# Altium PCB Audiodevice.PcbDoc (part 2 of 3)
Units mm, origin at the board's own origin, x right, y up, seen from the top; angles counter-clockwise.
Board outline 193.67 x 66.67 mm, 2 copper layers (Top Layer, Bottom Layer); 196 components, 164 nets, 795 pads, 323 vias.
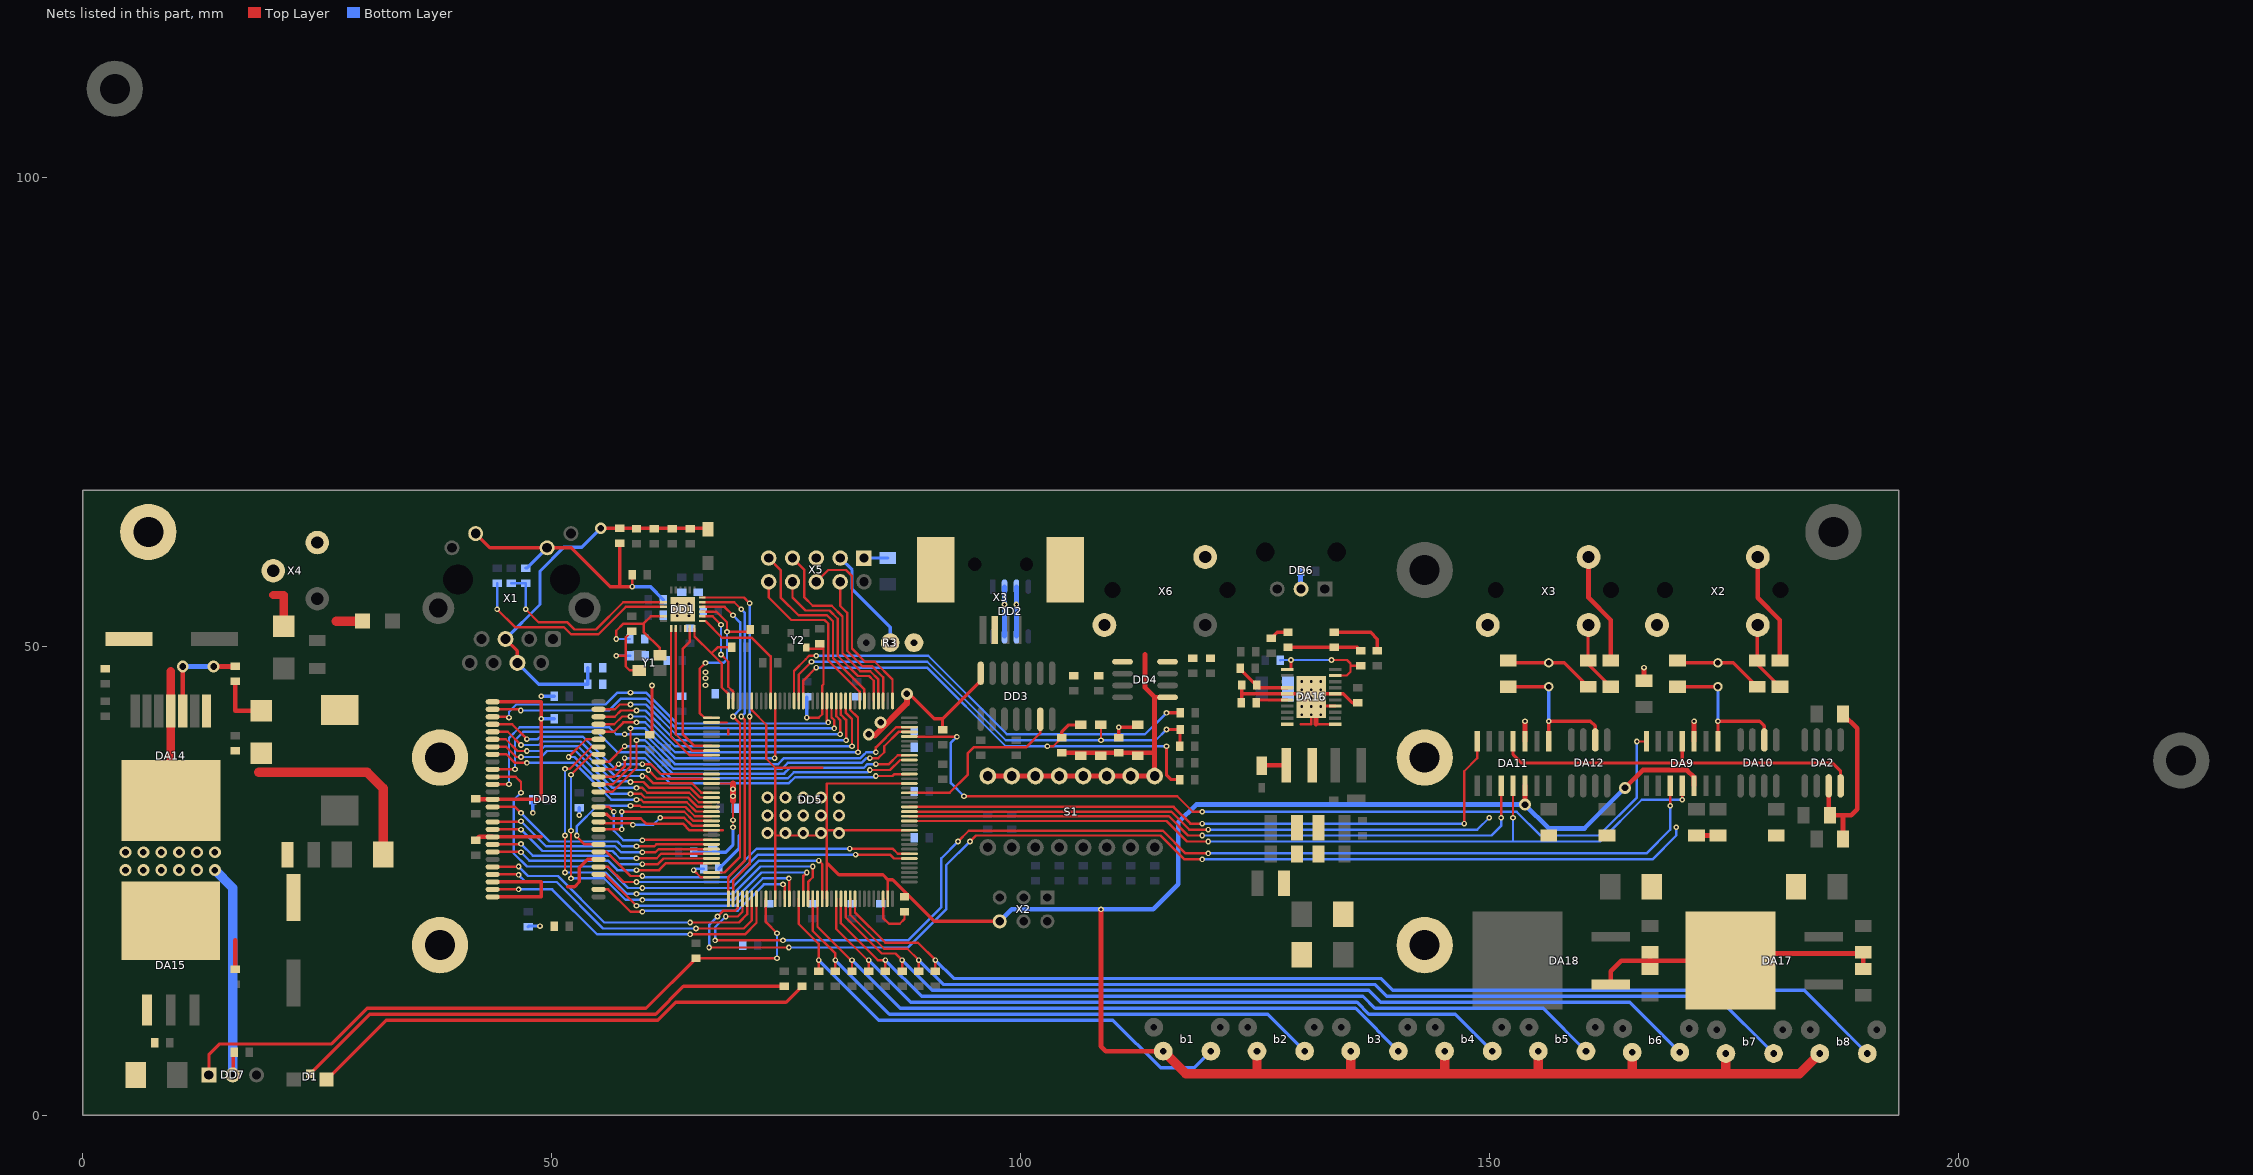
[diagram p2: the nets of this part, all layers, seen from the top]

## Via types
v1: diameter 0.6, hole 0.3, Top Layer to Bottom Layer, 276 vias
v2: diameter 1.27, hole 0.711, Top Layer to Bottom Layer, 47 vias

## Nets (pads, with @x,y where several pads share a name; then routed paths per layer and width w, separated by ;. In a path a pad name is that pad's centre, name@x,y a point inside that pad or via, vN(x,y) a via of type N, cw(c..) or ccw(c..) an arc to the next point about the centre after c; other vN are vias at no path point) (continued)
ADC1: D4.1 DD5.20 R59.1 R61.2 | length 54.6
  Top Layer w0.254: DD5.20@76.856,44.201 76.856,46.376 v1(78.232,47.752) ; v1@102.743,39.37 v1(102.87,39.37) 103.505,39.37 R61.2@104.394,40.259
  Top Layer w0.35: R61.2@104.394,40.259 104.394,40.894 105.14,41.64 D4.1@106.426,41.64 ; v1(115.57,39.37) 115.57,36.322 116.078,35.814 R59.1@116.993,35.814
  Bottom Layer w0.254: v1(78.232,47.752) 90.05,47.752 98.432,39.37 v1(102.87,39.37) v1(115.57,39.37)
ADC2: D3.1 DD5.21 R57.1 R60.2 | length 51.4
  Top Layer w0.254: DD5.21@76.356,44.201 76.356,47.019 v1(77.724,48.387) ; v1(108.585,40.005) D3.1@108.585,41.64
  Top Layer w0.35: v1(115.57,41.148) R60.2@117.018,41.148 117.018,39.37 R57.1@116.993,39.37
  Bottom Layer w0.254: v1(77.724,48.387) 90.057,48.387 98.439,40.005 v1(108.585,40.005) 114.427,40.005 v1(115.57,41.148)
ADC3: D2.1 DD5.22 R58.1 R62.2 | length 53.5
  Top Layer w0.254: DD5.22@75.856,44.201 75.856,47.403 77.097,48.644 77.097,48.647 77.464,49.014 77.467,49.014 77.475,49.022 v1(78.232,49.022)
  Top Layer w0.35: R62.2@110.49,40.259 v1(110.49,41.402) 112.284,41.402 D2.1@112.522,41.64 ; v1(115.57,42.926) R58.1@117.018,42.926
  Bottom Layer w0.254: v1(78.232,49.022) 90.17,49.022 98.552,40.64 110.49,40.64 ; v1(110.49,41.402) 110.49,40.64 ; v1(115.57,42.926) 113.284,40.64 110.49,40.64
Bt_1: b1.2 DD5.88 R33.1 | length 55.9
  Top Layer w0.254: DD5.88@76.356,23.101 76.356,20.418 78.486,18.288 v1(78.486,16.561) R33.1@78.486,15.392
  Bottom Layer w0.35: v1(78.486,16.561) 84.887,10.16 109.855,10.16 114.935,5.08 118.527,5.08 b1.2@120.305,6.858
Bt_2: b2.2 DD5.91 R34.1 | length 62.8
  Top Layer w0.254: DD5.91@77.856,23.101 77.856,19.68 80.264,17.272 v1(80.264,16.561) R34.1@80.264,15.392
  Bottom Layer w0.35: v1(80.264,16.561) 86.03,10.795 126.368,10.795 b2.2@130.305,6.858
Bt_3: b3.2 DD5.92 R35.1 | length 71.6
  Top Layer w0.254: DD5.92@78.356,23.101 78.356,20.12 v1@82.042,16.434 ; R35.1@82.042,15.392 v1@82.042,16.434 ; v1(82.042,16.561) v1@82.042,16.434
  Bottom Layer w0.35: v1(82.042,16.561) 87.173,11.43 135.733,11.43 b3.2@140.305,6.858
Bt_4: b4.2 DD5.96 R36.1 | length 79.8
  Top Layer w0.254: DD5.96@80.356,23.101 80.356,19.898 v1@83.82,16.434 ; R36.1@83.82,15.392 v1@83.82,16.434 ; v1(83.82,16.561) v1@83.82,16.434
  Bottom Layer w0.35: v1(83.82,16.561) 88.316,12.065 135.89,12.065 137.16,10.795 146.368,10.795 b4.2@150.305,6.858
Bt_5: b5.2 DD5.97 R37.1 | length 88.9
  Top Layer w0.254: DD5.97@80.856,23.101 80.856,20.49 84.785,16.561 v1(85.598,16.561) R37.1@85.598,15.392
  Bottom Layer w0.35: v1(85.598,16.561) 89.459,12.7 136.525,12.7 137.795,11.43 155.733,11.43 b5.2@160.305,6.858
Bt_6: b6.2 DD5.98 R38.1 | length 98.1
  Top Layer w0.254: DD5.98@81.356,23.101 81.356,21.133 85.217,17.272 86.665,17.272 v1(87.376,16.561) R38.1@87.376,15.392
  Bottom Layer w0.35: v1(87.376,16.561) 90.602,13.335 137.16,13.335 138.43,12.065 164.971,12.065 b6.2@170.305,6.731
Bt_7: b7.2 DD5.99 R39.1 | length 107.5
  Top Layer w0.254: DD5.99@81.856,23.101 81.856,21.395 85.471,17.78 87.935,17.78 v1(89.154,16.561) R39.1@89.154,15.392
  Bottom Layer w0.35: v1(89.154,16.561) 91.745,13.97 137.795,13.97 139.065,12.7 174.209,12.7 b7.2@180.305,6.604
Bt_8: b8.2 DD5.100 R40.1 | length 116.8
  Top Layer w0.254: DD5.100@82.356,23.101 82.356,21.657 85.598,18.415 89.078,18.415 v1(90.932,16.561) R40.1@90.932,15.392
  Bottom Layer w0.35: v1(90.932,16.561) 92.888,14.605 138.43,14.605 139.7,13.335 183.574,13.335 b8.2@190.305,6.604
Coax_nEN: DD3.13 DD5.128 | length 19.4
  Top Layer w0.254: DD5.128@88.156,34.401 92.445,34.401 94.361,36.317 94.361,38.608 94.996,39.243 100.584,39.243 102.108,40.767 DD3.13@102.108,42.254
CS1: DA11.7 DD5.125 | length 69.3
  Top Layer w0.254: DD5.125@88.156,32.901 116.332,32.901 118.118,31.115 v1(119.38,31.115) ; v1(147.32,31.115) 147.32,36.703 148.717,38.1 DA11.7@148.717,39.903
  Bottom Layer w0.254: v1(119.38,31.115) v1(147.32,31.115)
CS2: DA9.7 DD5.140 | length 94.4
  Top Layer w0.254: DD5.140@88.156,40.401 93.203,40.401 v1(93.218,40.386) ; v1(93.98,34.036) 116.713,34.036 118.364,32.385 v1(119.38,32.385) ; v1(165.735,39.878) 166.726,39.878 DA9.7@166.751,39.903
  Bottom Layer w0.254: v1(93.218,40.386) 92.583,39.751 92.583,35.433 v1(93.98,34.036) ; v1(119.38,32.385) 152.908,32.385 155.448,29.845 161.671,29.845 165.735,33.909 v1(165.735,39.878)
En: DA16.9 DA16.11 R48.1 R51.2 | length 12.8
  Top Layer w0.254: v1(133.167,48.57) 134.818,48.57 135.199,48.189 135.199,47.955 ; DA16.9@133.558,46.908 134.792,46.908 135.199,47.315 135.199,47.955 ; R51.2@136.271,47.955 135.199,47.955
  Top Layer w0.35: DA16.11@128.458,47.558 128.849,47.558 v1(128.849,48.57)
  Bottom Layer w0.254: R48.1@127.706,48.519 127.757,48.57 v1(128.849,48.57) v1(133.167,48.57)
Eth_CRS_DV: DD1.11 DD5.43 | length 15.1
  Top Layer w0.254: DD1.11@64.746,51.918 64.746,50.522 64.008,49.784 64.008,40.633 65.236,39.405 DD5.43@67.047,39.405
Eth_MDC: DD1.13 DD5.27 | length 13.6
  Top Layer w0.254: DD1.13@66.053,52.725 66.401,52.725 68.199,50.927 71.374,50.927 73.356,48.945 DD5.27@73.356,44.201
Eth_MDIO: DD1.12 DD5.36 R1.1 | length 11.6
  Top Layer w0.254: DD1.12@65.246,51.918 65.246,51.086 67.056,49.276 ; DD5.36@68.856,44.201 68.856,44.936 68.145,45.647 68.145,48.187 67.056,49.276 ; R1.1@69.215,49.911 67.691,49.911 67.056,49.276
Eth_REF_CLK: DD1.14 DD5.35 | length 11
  Top Layer w0.254: DD1.14@66.053,53.225 67.171,53.225 v1(68.072,52.324) ; v1(68.072,49.149) 68.834,48.387 68.834,45.72 69.356,45.198 DD5.35@69.356,44.201
  Bottom Layer w0.254: v1(68.072,49.149) v1(68.072,52.324)
Eth_RST: DD1.15 DD5.37 R2.1 | length 19.2
  Top Layer w0.254: DD1.15@66.053,53.725 67.564,53.725 68.707,52.582 v1(68.707,51.562) 70.917,51.562 R2.1@71.171,51.816 ; v1(66.421,48.26) 65.786,47.625 65.786,42.926 66.311,42.401 DD5.37@67.056,42.401
  Bottom Layer w0.254: v1(66.421,48.26) 68.326,48.26 68.707,48.641 v1(68.707,51.562)
Eth_RX_ER: DD1.10
Eth_RXD0: DD1.8 DD5.44 | length 15.8
  Top Layer w0.254: DD1.8@63.246,51.918 63.246,40.64 64.981,38.905 DD5.44@67.047,38.905
Eth_RXD1: DD1.7 DD5.45 | length 16.6
  Top Layer w0.254: DD1.7@62.738,51.898 62.738,40.386 64.719,38.405 DD5.45@67.047,38.405
Eth_TX_EN: DD1.16 DD5.70 | length 34.1
  Top Layer w0.254: DD1.16@66.053,54.225 68.457,54.225 v1(69.342,53.34) ; DD5.70@67.056,25.901 68.446,25.901 70.096,27.551 70.096,41.791 v1(69.342,42.545)
  Bottom Layer w0.254: v1(69.342,42.545) 70.104,43.307 70.104,52.578 v1(69.342,53.34)
Eth_TXD0: DD1.17 DD5.73 | length 36.6
  Top Layer w0.254: DD1.17@66.053,54.725 69.481,54.725 v1(70.231,53.975) ; DD5.73@68.856,23.101 68.856,25.422 70.612,27.178 70.612,42.164 v1(70.231,42.545)
  Bottom Layer w0.254: v1(70.231,42.545) 70.612,42.926 70.612,53.594 v1(70.231,53.975)
Eth_TXD1: DD1.18 DD5.74 | length 37.4
  Top Layer w0.254: DD1.18@66.053,55.225 70.505,55.225 v1(71.12,54.61) ; DD5.74@69.356,23.101 69.356,25.033 71.12,26.797 v1@71.12,42.418
  Bottom Layer w0.254: v1(71.12,42.545) v1(71.12,54.61)
Eye: DD5.81 DD7.1 R20.1 | length 73.8
  Top Layer w0.254: R20.1@65.405,16.764 v1(74.041,16.764) v1@74.041,16.891 ; DD5.81@72.856,23.101 72.856,20.616 v1(74.041,19.431)
  Top Layer w0.35: DD7.1@13.462,4.318 13.462,6.477 14.605,7.62 26.543,7.62 30.353,11.43 60.071,11.43 R20.1@65.405,16.764
  Bottom Layer w0.254: v1@74.041,16.891 v1(74.041,19.431)
FMC_A0: DD5.10 DD8.23 | length 35.2
  Top Layer w0.254: DD8.23@55.016,40.906 56.654,40.906 57.658,41.91 v1(59.055,41.91) ; DD5.10@81.856,44.201 81.856,43.239 82.677,42.418 v1(82.677,38.735)
  Bottom Layer w0.254: v1(59.055,41.91) 59.986,41.91 63.161,38.735 v1(82.677,38.735)
FMC_A1: DD5.11 DD8.24 | length 33.8
  Top Layer w0.254: DD8.24@55.016,41.706 56.692,41.706 57.531,42.545 v1(58.42,42.545) ; DD5.11@81.356,44.201 81.356,42.977 82.042,42.291 v1(82.042,39.37)
  Bottom Layer w0.254: v1(58.42,42.545) 59.993,42.545 63.168,39.37 v1(82.042,39.37)
FMC_A2: DD5.12 DD8.25 | length 32.4
  Top Layer w0.254: DD8.25@55.016,42.506 56.73,42.506 57.404,43.18 v1(59.055,43.18) ; DD5.12@80.856,44.201 80.856,42.727 81.407,42.176 v1(81.407,40.005)
  Bottom Layer w0.254: v1(59.055,43.18) 60,43.18 63.175,40.005 v1(81.407,40.005)
FMC_A3: DD5.13 DD8.26 | length 31
  Top Layer w0.254: DD8.26@55.016,43.306 56.768,43.306 57.277,43.815 v1(58.42,43.815) ; DD5.13@80.356,44.201 80.356,42.585 80.772,42.169 v1(80.772,40.64)
  Bottom Layer w0.254: v1(58.42,43.815) 60.071,43.815 63.246,40.64 v1(80.772,40.64)
FMC_A4: DD5.14 DD8.29 | length 41.3
  Top Layer w0.254: DD8.29@43.716,43.306 v1@46.711,43.306 ; DD5.14@79.856,44.201 79.856,42.443 80.137,42.162 v1(80.137,41.275)
  Bottom Layer w0.254: v1(46.711,43.18) 56.134,43.18 57.404,44.45 60.078,44.45 63.253,41.275 v1(80.137,41.275)
FMC_A5: DD5.15 DD8.30 | length 41.1
  Top Layer w0.254: DD8.30@43.716,42.506 45.378,42.506 v1(45.466,42.418) ; DD5.15@79.356,44.201 79.356,42.056 v1(79.502,41.91)
  Bottom Layer w0.254: v1(45.466,42.418) 45.466,43.053 46.228,43.815 55.753,43.815 57.023,45.085 v1(58.42,45.085) 60.085,45.085 63.379,41.791 79.383,41.791 v1(79.502,41.91)
FMC_A6: DD5.50 DD8.31 | length 25.9
  Top Layer w0.254: DD8.31@43.716,41.706 45.797,41.706 v1(47.371,40.132) ; v1(60.325,36.83) 61.25,35.905 DD5.50@67.047,35.905
  Bottom Layer w0.254: v1(47.371,40.132) 48.514,40.132 48.768,40.386 53.34,40.386 56.896,36.83 v1(60.325,36.83)
FMC_A7: DD5.53 DD8.32 | length 26.3
  Top Layer w0.254: DD8.32@43.716,40.906 45.327,40.906 v1(46.736,39.497) ; v1(59.69,36.195) 60.071,36.195 60.833,35.433 64.946,35.433 65.978,34.401 DD5.53@67.056,34.401
  Bottom Layer w0.254: v1(46.736,39.497) 48.641,39.497 49.022,39.878 53.086,39.878 56.769,36.195 v1(59.69,36.195)
FMC_A8: DD5.54 DD8.33 | length 26.3
  Top Layer w0.254: DD8.33@43.716,40.106 45.111,40.106 46.355,38.862 v1(47.371,38.862) ; v1(58.42,35.56) 59.817,35.56 60.452,34.925 64.812,34.925 65.832,33.905 DD5.54@67.047,33.905
  Bottom Layer w0.254: v1(47.371,38.862) 48.768,38.862 49.276,39.37 52.832,39.37 56.569,35.633 58.347,35.633 v1(58.42,35.56)
FMC_A9: DD5.55 DD8.34 | length 26.3
  Top Layer w0.254: DD8.34@43.716,39.306 45.149,39.306 46.228,38.227 v1(46.736,38.227) ; v1(59.055,34.925) 59.69,34.925 60.198,34.417 64.678,34.417 65.69,33.405 DD5.55@67.047,33.405
  Bottom Layer w0.254: v1(46.736,38.227) 48.895,38.227 49.53,38.862 52.578,38.862 56.515,34.925 v1(59.055,34.925)
FMC_A10: DD5.56 DD8.22 | length 21.8
  Top Layer w0.254: v1(51.816,38.227) 53.695,40.106 DD8.22@55.016,40.106 DD8.22@55.397,40.106 ; v1(58.42,34.29) 59.563,34.29 59.944,33.909 64.544,33.909 65.548,32.905 DD5.56@67.047,32.905
  Bottom Layer w0.254: v1(51.816,38.227) 52.451,38.227 56.388,34.29 v1(58.42,34.29)
FMC_A11: DD5.57 DD8.35 | length 25.9
  Top Layer w0.254: DD8.35@43.716,38.506 45.187,38.506 46.101,37.592 v1(47.371,37.592) ; v1(59.055,33.655) 59.556,33.655 59.817,33.394 64.417,33.394 65.406,32.405 DD5.57@67.047,32.405
  Bottom Layer w0.254: v1(47.371,37.592) 52.444,37.592 56.381,33.655 v1(59.055,33.655)
FMC_BA0: DD5.89 DD8.20 | length 45
  Top Layer w0.254: v1(52.07,25.273) v1@52.07,30.226 ; v1(52.07,36.322) 54.254,38.506 DD8.20@55.016,38.506 ; DD5.89@76.856,23.101 76.856,25.548 v1(77.216,25.908)
  Bottom Layer w0.254: v1(52.07,25.273) 55.626,25.273 57.912,22.987 v1(59.69,22.987) 69.469,22.987 72.39,25.908 v1(77.216,25.908) ; v1(52.07,30.353) v1(52.07,36.322)
FMC_BA1: DD5.90 DD8.21 | length 47.7
  Top Layer w0.254: v1(51.435,25.908) v1@51.435,29.718 ; v1(51.435,36.957) 51.943,36.957 54.292,39.306 DD8.21@55.016,39.306 ; DD5.90@77.356,23.101 77.356,24.905 77.851,25.4 v1(77.851,26.543)
  Bottom Layer w0.254: v1(51.435,25.908) 55.753,25.908 58.039,23.622 v1(59.055,23.622) 69.342,23.622 72.263,26.543 v1(77.851,26.543) ; v1(51.435,29.845) v1(51.435,36.957)
FMC_D0: DD5.85 DD8.2 | length 23.5
  Top Layer w0.254: DD8.2@55.016,24.106 56.031,24.106 58.42,21.717 v1(59.69,21.717) ; v1(74.676,24.638) 74.856,24.458 DD5.85@74.856,23.101
  Bottom Layer w0.254: v1(59.69,21.717) 59.817,21.844 69.85,21.844 72.644,24.638 v1(74.676,24.638)
FMC_D1: DD5.86 DD8.4 | length 25.1
  Top Layer w0.254: DD8.4@55.016,25.706 55.701,25.706 v1(59.055,22.352) ; v1(75.311,25.273) 75.356,25.228 DD5.86@75.356,23.101
  Bottom Layer w0.254: v1(59.055,22.352) 69.596,22.352 72.517,25.273 v1(75.311,25.273)
FMC_D2: DD5.114 DD8.5 | length 35.2
  Top Layer w0.254: DD8.5@55.016,26.506 56.044,26.506 57.658,24.892 v1(59.055,24.892) ; v1(82.423,27.813) 86.106,27.813 86.518,27.401 DD5.114@88.156,27.401
  Bottom Layer w0.254: v1@59.055,24.765 v1@59.063,24.773 ; v1(59.055,24.892) 69.088,24.892 72.009,27.813 v1(82.423,27.813)
FMC_D3: DD5.115 DD8.7 | length 35.7
  Top Layer w0.254: DD8.7@55.016,28.106 55.841,28.106 58.42,25.527 v1(59.69,25.527) ; v1(81.788,28.448) 86.36,28.448 86.907,27.901 DD5.115@88.156,27.901
  Bottom Layer w0.254: v1(59.69,25.527) 59.817,25.4 68.834,25.4 71.882,28.448 v1(81.788,28.448)
FMC_D4: DD5.58 DD8.8 | length 19.9
  Top Layer w0.254: v1@52.705,29.718 53.517,28.906 DD8.8@55.016,28.906 DD8.8@55.397,28.906 ; v1(58.42,33.02) 59.436,33.02 59.563,32.893 64.276,32.893 65.264,31.905 DD5.58@67.047,31.905
  Bottom Layer w0.254: v1@52.705,29.718 v1(52.705,29.845) 52.705,30.861 54.864,33.02 v1(58.42,33.02)
FMC_D5: DD5.59 DD8.10 | length 14.3
  Top Layer w0.254: DD8.10@55.016,30.506 v1(57.48,30.506) ; v1(57.48,32.385) 64.142,32.385 65.122,31.405 DD5.59@67.047,31.405
  Bottom Layer w0.254: v1(57.48,30.506) v1(57.48,32.385)
FMC_D6: DD5.60 DD8.11 | length 12.8
  Top Layer w0.254: DD8.11@55.016,31.306 55.182,31.14 58.522,31.14 v1(58.674,30.988) ; v1(61.595,31.75) 64.135,31.75 64.98,30.905 DD5.60@67.047,30.905
  Bottom Layer w0.254: v1(58.674,30.988) 60.833,30.988 v1(61.595,31.75)
FMC_D7: DD5.63 DD8.13 | length 14.8
  Top Layer w0.254: DD8.13@55.016,32.906 56.121,32.906 v1(56.642,32.385) ; v1@59.69,29.21 59.881,29.401 DD5.63@67.056,29.401
  Bottom Layer w0.254: v1(56.642,32.385) 56.642,30.353 57.658,29.337 59.563,29.337 v1@59.69,29.21
  other v1: 59.69,29.337
FMC_D8: DD5.64 DD8.42 | length 25.2
  Top Layer w0.254: DD8.42@43.716,32.906 46.088,32.906 v1(46.736,32.258) ; v1(59.055,28.702) 60.96,28.702 61.159,28.901 DD5.64@67.056,28.901
  Bottom Layer w0.254: v1(46.736,32.258) 49.784,29.21 57.023,29.21 57.531,28.702 v1(59.055,28.702)
FMC_D9: DD5.65 DD8.44 | length 24.9
  Top Layer w0.254: DD8.44@43.716,31.306 46.673,31.306 v1(46.736,31.369) ; v1(59.69,28.067) 61.087,28.067 61.421,28.401 DD5.65@67.056,28.401
  Bottom Layer w0.254: v1(46.736,31.369) 49.403,28.702 56.769,28.702 57.404,28.067 v1(59.69,28.067)
FMC_D10: DD5.66 DD8.45 | length 24.8
  Top Layer w0.254: DD8.45@43.716,30.506 46.71,30.506 v1(46.736,30.48) ; v1(59.055,27.432) 61.214,27.432 61.683,27.901 DD5.66@67.056,27.901
  Bottom Layer w0.254: v1(46.736,30.48) 49.022,28.194 56.515,28.194 57.277,27.432 v1(59.055,27.432)
FMC_D11: DD5.67 DD8.47 | length 24.5
  Top Layer w0.254: DD8.47@43.716,28.906 46.686,28.906 v1(46.736,28.956) ; v1(59.69,26.797) 61.341,26.797 61.945,27.401 DD5.67@67.056,27.401
  Bottom Layer w0.254: v1(46.736,28.956) 48.006,27.686 56.261,27.686 57.15,26.797 v1(59.69,26.797)
FMC_D12: DD5.68 DD8.48 | length 24.5
  Top Layer w0.254: DD8.48@43.716,28.106 46.697,28.106 v1(46.736,28.067) ; v1(59.055,26.162) 61.468,26.162 62.207,26.901 DD5.68@67.056,26.901
  Bottom Layer w0.254: v1(46.736,28.067) 47.625,27.178 56.007,27.178 57.023,26.162 v1(59.055,26.162)
FMC_D13: DD5.77 DD8.50 | length 31.6
  Top Layer w0.254: DD8.50@43.716,26.506 v1@46.482,26.506 ; v1(64.77,20.574) 69.977,20.574 70.856,21.453 DD5.77@70.856,23.101
  Bottom Layer w0.254: v1(46.482,26.543) 47.498,25.527 50.673,25.527 55.626,20.574 v1(64.77,20.574)
FMC_D14: DD5.78 DD8.51 | length 32.7
  Top Layer w0.254: DD8.51@43.716,25.706 v1@46.482,25.706 ; v1(65.405,19.939) 70.485,19.939 71.356,20.81 DD5.78@71.356,23.101
  Bottom Layer w0.254: v1(46.482,25.654) 47.244,24.892 50.546,24.892 55.499,19.939 v1(65.405,19.939)
FMC_D15: DD5.79 DD8.53 | length 32.9
  Top Layer w0.254: DD8.53@43.716,24.106 v1(46.482,24.106) ; v1(64.77,19.304) 70.612,19.304 71.856,20.548 DD5.79@71.856,23.101
  Bottom Layer w0.254: v1@46.736,24.106 50.062,24.106 54.864,19.304 v1(64.77,19.304)
FMC_NBL0: DD5.141 DD8.15 | length 40.4
  Top Layer w0.254: DD8.15@55.016,34.506 56.477,34.506 59.055,37.084 v1(59.055,40.005) ; v1(83.947,38.1) 84.836,38.1 85.471,38.735 85.471,39.37 87.002,40.901 DD5.141@88.156,40.901
  Bottom Layer w0.254: v1(59.055,40.005) 59.965,40.005 63.013,36.957 74.549,36.957 75.184,37.592 83.063,37.592 83.571,38.1 v1(83.947,38.1)
FMC_NBL1: DD5.142 DD8.39 | length 53.4
  Top Layer w0.254: DD8.39@43.716,35.306 v1(45.466,35.306) ; v1(84.582,38.735) 84.582,39.243 86.74,41.401 DD5.142@88.156,41.401
  Bottom Layer w0.254: v1(45.466,35.306) 45.466,40.259 46.609,41.402 56.134,41.402 56.896,40.64 v1(57.785,40.64) 59.972,40.64 63.147,37.465 74.168,37.465 74.803,38.1 82.929,38.1 83.304,38.475 83.304,38.48 83.559,38.735 v1(84.582,38.735)
FMC_nCAS: DD5.132 DD8.17 | length 36
  Top Layer w0.254: DD8.17@55.016,36.106 56.678,36.106 57.785,37.213 v1(57.785,38.1) ; v1(84.582,36.195) 86.36,36.195 86.566,36.401 DD5.132@88.156,36.401
  Bottom Layer w0.254: v1(57.785,38.1) 59.944,38.1 62.611,35.433 75.318,35.433 75.953,36.068 84.455,36.068 v1(84.582,36.195)
FMC_nRAS: DD5.49 DD8.18 | length 12.7
  Top Layer w0.254: DD8.18@55.016,36.906 56.591,36.906 v1(57.15,37.465) ; v1(59.69,37.465) 60.579,37.465 61.639,36.405 DD5.49@67.047,36.405
  Bottom Layer w0.254: v1(57.15,37.465) v1(59.69,37.465)
FMC_nWE: DD5.26 DD8.16 | length 31.1
  Top Layer w0.254: DD8.16@55.016,35.306 56.52,35.306 58.42,37.206 v1(58.42,41.275) ; v1(73.787,38.1) 73.856,38.169 DD5.26@73.856,44.201
  Bottom Layer w0.254: v1(58.42,41.275) 59.979,41.275 63.154,38.1 v1(73.787,38.1)
FMC_SDCKE1: DD5.135 DD8.37 | length 50.8
  Top Layer w0.254: DD8.37@43.716,36.906 v1(46.101,36.906) ; v1(83.947,36.83) 86.106,36.83 87.177,37.901 DD5.135@88.156,37.901
  Bottom Layer w0.254: v1(46.101,36.906) 46.101,40.005 46.99,40.894 54.864,40.894 57.023,38.735 59.951,38.735 62.745,35.941 75.184,35.941 75.819,36.576 83.693,36.576 v1(83.947,36.83)
FMC_SDCLK: DD5.93 DD8.38 | length 50.7
  Top Layer w0.254: DD8.38@43.716,36.106 46.19,36.106 46.736,35.56 v1(46.736,34.417) ; v1(78.486,27.178) 78.856,26.808 DD5.93@78.856,23.101
  Bottom Layer w0.254: v1(46.736,34.417) 45.974,33.655 45.974,27.94 47.371,26.543 55.88,26.543 58.166,24.257 v1(59.69,24.257) 69.215,24.257 72.136,27.178 v1(78.486,27.178)
FMC_SDnE1: DD5.136 DD8.19 | length 35.8
  Top Layer w0.254: DD8.19@55.016,37.706 56.121,37.706 v1(57.785,39.37) ; v1(84.582,37.465) 85.979,37.465 86.915,38.401 DD5.136@88.156,38.401
  Bottom Layer w0.254: v1(57.785,39.37) 59.958,39.37 62.879,36.449 74.803,36.449 75.438,37.084 83.312,37.084 83.693,37.465 v1(84.582,37.465)
GND: b1.1 b2.1 b3.1 b4.1 b5.1 b6.1 b7.1 b8.1 C1.1 C2.1 C3.1 C4.1 C5.1 C6.2 C7.1 C8.1 C9.1 C10.1 C11.1 C12.1 C13.2 C14.2 C15.1 C16.2 C17.2 C18.2 C21.2 C22.2 C23.2 C24.2 C25.2 C26.2 C27.2 C28.2 C29.2 C30.2 C31.2 C32.2 C33.2 C34.2 C35.2 C36.2 C37.2 C38.2 C39.2 C40.2 C41.2 C42.2 C43.2 C44.2 C45.2 C46.2 C47.2 C52.2 C53.2 C54.2 C55.2 C60.2 C61.2 C62.2 C64.2 C65.2 C66.2 C67.2 C70.1 C71.1 C72.1 C74.1 C75.1 C76.1 C77.1 C78.2 C79.2 C80.1 C81.1 C82.1 C83.1 C84.2 C85.1 C86.1 C87.2 C88.2 C90.2 C91.2 D2.2 D3.2 D4.2 D6.2 D7.1 D8.2 D9.1 D12.2 D13.2 D14.1 D15.1 DA2.3 DA9.3 DA9.12 DA11.3 DA11.12 DA14.4 DA14.8 DA15.1 DA15.4 DA16.1 DA16.4 DA16.6 DA16.15 DA16.21 DA17.4 DA18.1 DD1.25 DD2.2 DD2.3 DD2.6 DD2.7 DD3.7 DD4.1 DD4.4 DD4.5 DD5.16 DD5.31 DD5.38 DD5.51 DD5.61 DD5.83 DD5.94 DD5.107 DD5.120 DD5.130 DD6.2 DD7.2 DD8.6 DD8.12 DD8.28 DD8.41 DD8.46 DD8.52 DD8.54 L2.1 pad.Mount@7,62.215 pad.Mount@38.1,18.16 pad.Mount@38.1,38.16 pad.Mount@143.1,18.16 pad.Mount@143.1,38.16 R3.1 R4.2 R9.1 R15.1 R18.1 R22.1 R31.2 R47.1 R51.1 R53.1 R61.1 R62.1 S1.9 S1.10 S1.11 S1.12 S1.13 S1.14 S1.15 S1.16 X1.10 X1.11 X2.2@178.629,59.547 X2.3@167.879,52.297 X2.6 X3.2@160.579,59.547 X3.3@149.829,52.297 X3.4 X3.5 X3.6 X4.2 X4.3 X5.1 X5.5 X6.2 X6.3 Y2.2 | length 685.6
  Top Layer w0.254: v1(58.598,56.388) R9.1@58.598,57.658 R9.1@58.598,57.785 ; 59.512,31.674 60.071,31.115 64.008,31.115 64.722,30.401 ; DD5.51@67.056,35.401 69.342,35.401 ; DD5.38@67.056,41.901 68.707,41.901 ; 68.834,40.64 68.834,41.148 ; v1@69.342,31.225 v1(69.342,31.496) 69.342,33.528 ; DD5.31@71.356,44.201 71.356,43.198 72.898,41.656 72.898,38.042 73.856,37.084 ; DD5.83@73.856,23.101 73.856,29.845 ; Y2.2@77.152,49.771 78.995,49.771 ; v1(77.216,42.418) 78.486,42.418 78.856,42.788 DD5.16@78.856,44.201 78.856,45.836 78.995,45.975 78.995,49.771 ; C23.2@78.613,50.292 78.995,49.91 78.995,49.771 ; 78.856,37.084 73.856,37.084 ; DD5.94@79.356,23.101 79.356,26.797 ; 79.502,26.797 79.356,26.797 ; DD5.107@85.856,23.101 85.856,25.142 ; DD5.120@88.156,30.401 79.356,30.401 ; DD5.130@88.156,35.401 79.356,35.401 79.356,30.401 ; 73.856,29.845 79.356,29.845 ; 73.856,29.845 73.856,37.084 ; 79.356,26.797 79.356,29.845 ; 79.356,29.845 79.356,30.401
  Top Layer w0.3: 64.722,30.401 DD5.61@67.056,30.401 68.264,30.401 ; 129.916,41.708 131.008,41.708 v1(131.008,42.728) v1(131.008,43.617) v1(131.008,44.506) DA16.21@131.008,44.633 ; 131.519,41.708 DA16.1@133.558,41.708
  Top Layer w0.35: DD7.2@16.002,4.318 16.053,4.369 C16.2@16.053,6.731 ; C31.2@41.91,33.782 C31.2@41.986,33.706 ; X1.11@41.91,62.05 43.43,60.53 X1.10@49.53,60.53 52.119,60.53 56.261,56.388 57.277,56.388 ; DD8.54@43.716,23.306 48.895,23.306 48.895,24.906 DD8.52@43.716,24.906 ; DD8.46@43.716,29.706 48.895,29.706 ; DD8.41@43.716,33.706 48.895,33.706 v1(48.895,42.291) 48.895,44.106 DD8.28@43.716,44.106 ; 51.689,24.384 52.451,24.384 52.959,24.892 52.959,26.416 53.849,27.306 DD8.6@55.016,27.306 ; DD8.12@55.016,32.106 55.905,32.106 56.337,31.674 59.512,31.674 ; C13.2@57.277,61.011 57.277,56.388 ; v1(58.598,56.388) 57.277,56.388 ; R22.1@60.452,40.589 60.706,40.843 v1(60.706,45.847) ; 79.502,26.797 80.645,25.654 85.344,25.654 85.856,25.142 86.364,25.142 90.805,20.701 X2.6@97.79,20.701 ; v2(87.884,44.958) 88.138,44.958 90.805,42.291 91.694,42.291 ; R31.2@91.694,41.148 91.694,42.291 ; DD3.7@95.758,47.154 95.758,46.355 91.694,42.291 ; C83.1@123.566,43.998 123.596,43.998 123.596,44.958 ; C84.2@123.596,45.903 123.596,44.958 ; C86.1@128.524,49.911 C85.1@133.477,49.911 135.915,49.911 R51.1@136.271,49.555 ; DA16.21@131.519,43.744 131.605,43.658 DA16.4@133.558,43.658 ; DA16.21@131.643,44.958 DA16.6@133.558,44.958 134.442,44.958 135.402,43.998 R53.1@135.961,43.998 ; DA16.21@131.897,45.522 DA16.21@131.008,44.633 130.683,44.958 DA16.15@128.458,44.958 123.596,44.958
  Top Layer w0.5: C70.1@16.256,15.57 16.256,18.669 ; C30.2@41.91,29.337 42.279,29.706 DD8.46@43.716,29.706 ; C31.2@41.986,33.706 DD8.41@43.716,33.706 ; S1.16@96.52,36.195 S1.15@99.06,36.195 S1.14@101.6,36.195 S1.13@104.14,36.195 S1.12@106.68,36.195 S1.11@109.22,36.195 S1.10@111.76,36.195 S1.9@114.3,36.195 114.3,38.659 ; R61.1@104.394,38.659 R62.1@110.49,38.659 114.3,38.659 ; v1(108.585,21.971) 108.585,7.366 109.093,6.858 b1.1@115.225,6.858 ; 113.284,49.149 113.284,45.593 114.3,44.577 ; DD4.1@115.684,44.577 114.3,44.577 ; 131.519,41.708 DA16.21@131.519,43.744 ; v2@153.797,33.02 v2(153.797,33.147) DA11.12@153.797,35.179 ; DA11.3@153.797,39.903 v1(153.797,42.037) ; X3.2@160.579,59.547 160.579,55.194 162.941,52.832 C60.2@162.941,48.517 ; DA18.1@162.941,13.97 162.941,15.367 164.084,16.51 167.132,16.51 ; v2(164.465,34.925) 166.37,36.83 171.069,36.83 171.831,36.068 DA9.12@171.831,35.179 ; C61.2@166.497,46.358 v1(166.497,47.752) ; C90.2@167.132,15.624 167.132,16.51 ; C91.2@167.132,17.396 167.132,16.51 ; DA9.3@171.831,39.903 v1(171.831,42.037) ; C67.2@172.085,29.842 C66.2@174.371,29.842 ; X2.2@178.613,59.547 178.613,55.194 180.975,52.832 C52.2@180.975,48.517 ; C53.2@186.182,31.877 DA2.3@186.182,35.142 ; C53.2@186.312,32.004 187.709,32.004 ; C55.2@187.706,42.799 189.23,41.275 189.23,32.639 188.595,32.004 187.709,32.004 ; C54.2@187.709,29.464 187.709,32.004 ; C87.2@189.865,15.624 C88.2@189.865,17.272 ; C88.2@189.865,17.396 C88.2@189.865,17.272 ; 114.3,38.659 114.3,44.577 ; 167.132,16.51 DA17.4@175.724,16.51 176.486,17.272 C88.2@189.865,17.272
  Top Layer w0.6: 69.342,33.528 v1(69.342,34.036) v1(69.342,34.798) 69.342,35.401
  Top Layer w0.65: 84.455,40.513 87.884,43.942 v2(87.884,44.958)
  Top Layer w0.9: DA14.8@9.398,33.584 DA14.4@9.398,43.134 9.398,47.371 ; 20.319,55.499 21.463,55.499 D9.1@21.463,52.161
  Top Layer w1: 18.796,36.576 30.353,36.576 32.055,34.874 D8.2@32.055,27.813 D8.2@32.055,27.686 ; 27.051,52.705 C10.1@29.845,52.705 ; b1.1@115.225,6.858 117.638,4.445 125.225,4.445 ; b2.1@125.225,6.858 125.225,4.445 ; b3.1@135.225,6.858 135.225,4.445 ; b4.1@145.225,6.858 145.225,4.445 ; b5.1@155.225,6.858 155.225,4.445 ; b6.1@165.225,6.731 165.225,4.445 ; b7.1@175.225,6.604 175.225,4.445 ; b8.1@185.225,6.604 183.066,4.445 175.225,4.445 ; 125.225,4.445 135.225,4.445 ; 135.225,4.445 145.225,4.445 ; 145.225,4.445 155.225,4.445 ; 155.225,4.445 165.225,4.445 ; 165.225,4.445 175.225,4.445
  Bottom Layer w0.35: R4.2@47.244,58.369 47.369,58.369 X1.10@49.53,60.53 ; C32.2@47.498,20.117 47.574,20.193 v1(48.768,20.193) ; v1(48.006,32.258) C27.2@48.006,33.655 ; v1(48.895,42.291) C33.2@50.292,42.291 ; v1(48.895,44.704) C29.2@50.292,44.704 ; v1(52.959,32.004) C28.2@52.959,32.817 ; C35.2@65.151,28.067 68.58,28.067 69.342,28.829 v1(69.342,30.717) v1@69.342,30.844 ; C25.2@67.818,26.289 69.977,28.448 69.977,29.845 ; v1(77.216,42.418) C46.2@77.216,44.628 ; X5.1@83.312,59.436 C9.1@85.849,59.436
  Bottom Layer w0.4: v1(58.598,56.388) 60.516,56.388 C1.1@61.913,54.991
  Bottom Layer w0.5: X2.6@97.79,20.701 99.06,21.971 v1(108.585,21.971) 114.173,21.971 116.84,24.638 116.84,31.242 118.745,33.147 v2(153.797,33.147) 156.337,30.607 160.147,30.607 v2(164.465,34.925) ; DD2.7@98.298,51.088 DD2.2@98.298,56.388 ; DD2.6@99.568,51.088 v1(99.568,54.483) DD2.3@99.568,56.388 ; C22.2@129.87,58.039 129.87,55.949 DD6.2@129.921,55.898
  Bottom Layer w1: v2(14.097,26.162) 16.002,24.257 DD7.2@16.002,4.318
  other v1: 129.992,42.728 132.024,42.728 129.992,43.617 132.024,43.617 129.992,44.506 132.024,44.506 129.992,45.395 131.008,45.395 132.024,45.395 66.421,45.864 129.992,46.284 131.008,46.284 132.024,46.284 66.421,46.609 66.421,47.261 63.393,53.289 64.663,53.289 98.298,54.483 63.393,54.559 64.663,54.559
  other v2: 4.572,26.162 6.477,26.162 8.382,26.162 10.287,26.162 12.192,26.162 4.572,28.067 6.477,28.067 8.382,28.067 10.287,28.067 12.192,28.067 14.097,28.067 73.025,30.099 74.93,30.099 76.835,30.099 78.74,30.099 80.645,30.099 73.025,32.004 74.93,32.004 76.835,32.004 78.74,32.004 80.645,32.004 73.025,33.909 74.93,33.909 76.835,33.909 78.74,33.909 80.645,33.909 83.82,40.64 85.09,41.91
GNDS: DA2.4 DA9.4 DA11.4 | length 41
  Top Layer w0.35: DA11.4@152.527,39.903 152.527,38.481 153.416,37.592 170.561,37.592 ; DA9.4@170.561,39.903 170.561,37.592 ; DA2.4@187.452,35.142 187.452,36.703 186.563,37.592 170.561,37.592
L1.LINK: DD1.3 R12.1 | length 22.8
  Top Layer w0.254: v1(44.196,53.975) 46.101,52.07 51.308,52.07 52.07,51.308 54.991,51.308 57.908,54.225 DD1.3@61.939,54.225
  Bottom Layer w0.254: v1(44.196,53.975) R12.1@44.196,56.769
L2.SPEED: DD1.2 R4.1 R11.1 | length 21.1
  Top Layer w0.254: v1(47.244,53.975) 48.641,52.578 51.689,52.578 52.451,51.816 54.737,51.816 57.646,54.725 DD1.2@61.939,54.725
  Bottom Layer w0.254: R11.1@45.72,56.769 R4.1@47.244,56.769 v1(47.244,53.975)
LCD_D4: DD5.4 X5.7 | length 20.8
  Top Layer w0.254: X5.7@75.692,59.436 76.962,58.166 76.962,55.245 77.851,54.356 79.883,54.356 81.026,53.213 81.026,49.276 82.931,47.371 83.988,47.371 84.856,46.503 DD5.4@84.856,44.201
LCD_D5: DD5.5 X5.8 | length 18.5
  Top Layer w0.254: X5.8@75.692,56.896 75.692,55.245 77.089,53.848 79.629,53.848 80.518,52.959 80.518,49.022 82.677,46.863 83.854,46.863 84.356,46.361 DD5.5@84.356,44.201
LCD_D6: DD5.7 X5.9 | length 21.2
  Top Layer w0.254: X5.9@73.152,59.436 74.422,58.166 74.422,55.245 76.327,53.34 79.375,53.34 80.01,52.705 80.01,48.768 83.356,45.422 DD5.7@83.356,44.201
LCD_D7: DD5.8 X5.10 | length 18.8
  Top Layer w0.254: X5.10@73.152,56.896 73.152,55.245 75.565,52.832 79.121,52.832 79.502,52.451 79.502,48.514 82.856,45.16 DD5.8@82.856,44.201
LCD_E: DD5.1 X5.6 | length 20.3
  Top Layer w0.254: X5.6@78.232,56.896 79.502,58.166 81.407,58.166 82.042,57.531 82.042,49.784 83.439,48.387 84.455,48.387 86.356,46.486 DD5.1@86.356,44.201
LCD_RS: DD5.3 X5.4 | length 15.2
  Top Layer w0.254: X5.4@80.772,56.896 80.772,54.356 81.534,53.594 81.534,49.53 83.185,47.879 84.201,47.879 85.356,46.724 DD5.3@85.356,44.201
LCD_V0: R3.2 X5.3 | length 11.4
  Top Layer w0.254: X5.3@80.772,58.801 X5.3@80.899,58.801
  Bottom Layer w0.35: X5.3@80.772,59.436 82.042,58.166 82.042,56.134 86.106,52.07 R3.2@86.106,50.419
LDAC: DA9.11 DA11.11 DD5.122 | length 92.6
  Top Layer w0.254: DD5.122@88.156,31.401 115.57,31.401 117.761,29.21 v1(120.015,29.21) ; v1(152.527,31.75) DA11.11@152.527,35.179 ; v1(170.561,33.655) DA9.11@170.561,35.179
  Bottom Layer w0.254: v1(120.015,29.21) 152.527,29.21 ; v1(152.527,31.75) 152.527,29.21 ; v1(170.561,33.655) 166.243,33.655 161.798,29.21 152.527,29.21
MISO1: DD5.124 | length 63.2
  Top Layer w0.254: DD5.124@88.156,32.401 116.078,32.401 117.999,30.48 v1(120.015,30.48)
  Bottom Layer w0.254: v1(120.015,30.48) 148.717,30.48 v1(149.987,31.75)
MISO2: DD5.75 | length 121
  Top Layer w0.254: v1(66.802,17.907) v1(75.311,17.907) ; v1(67.691,21.209) 68.326,21.844 69.596,21.844 69.856,22.104 DD5.75@69.856,23.101 ; v1(94.615,29.21) 95.25,29.845 114.935,29.845 117.475,27.305 v1(119.38,27.305)
  Bottom Layer w0.254: v1(66.802,17.907) 66.802,20.32 v1(67.691,21.209) ; v1(75.311,17.907) 88.011,17.907 92.075,21.971 92.075,26.67 v1(94.615,29.21) ; v1(119.38,27.305) 167.386,27.305 169.926,29.845 v1(169.926,30.734)
MOSI1: DA11.10 DD5.123 | length 68.7
  Top Layer w0.254: DD5.123@88.156,31.901 115.824,31.901 117.88,29.845 v1(119.38,29.845) ; v1(151.257,31.75) DA11.10@151.257,35.179
  Bottom Layer w0.254: v1(119.38,29.845) 150.241,29.845 151.257,30.861 v1(151.257,31.75)
MOSI2: DA9.10 DD5.76 | length 122.8
  Top Layer w0.254: v1(67.437,18.669) v1(74.676,18.669) ; v1(68.58,21.209) 69.85,21.209 70.356,21.715 DD5.76@70.356,23.101 ; v1(93.345,29.21) 94.488,30.353 115.189,30.353 117.602,27.94 v1(120.015,27.94) ; v1(169.291,33.02) DA9.10@169.291,35.179
  Bottom Layer w0.254: v1@67.437,18.796 67.437,20.066 v1(68.58,21.209) ; v1(74.676,18.669) 88.011,18.669 91.567,22.225 91.567,27.432 v1(93.345,29.21) ; v1(120.015,27.94) 166.751,27.94 169.291,30.48 v1(169.291,33.02)
NetC11_2: C11.2 C12.2 C13.1 R5.2 R6.2 R7.2 R8.2 X1.4 X1.5 ZL1.2 | length 41.9
  Top Layer w0.35: X1.5@45.085,50.8 46.355,49.53 X1.4@46.355,48.26 ; v2(55.245,62.611) C13.1@57.277,62.611 66.57,62.611 ZL1.2@66.675,62.506
  Bottom Layer w0.35: X1.5@45.085,50.8 48.768,54.483 48.768,58.039 51.308,60.579 53.213,60.579 v2(55.245,62.611) ; X1.4@46.355,48.26 48.641,45.974 C12.2@53.848,45.974 C11.2@53.848,47.752
NetC14_1: C14.1 DD1.5 Y1.1 | length 12.1
  Top Layer w0.254: v1(56.896,50.8) 56.896,51.689 57.654,52.447 59.817,52.447 ; Y1.1@61.552,49.06 61.552,49.827 59.817,51.562 59.817,52.447 ; DD1.5@61.939,53.225 60.595,53.225 59.817,52.447
  Bottom Layer w0.254: v1(56.896,50.8) C14.1@58.344,50.8
NetC15_2: C15.2 R10.1 Y1.3 | length 8.1
  Top Layer w0.254: v1(56.896,49.022) 57.912,49.022 ; R10.1@58.547,51.613 57.912,50.978 57.912,49.022 ; Y1.3@59.352,47.46 58.331,47.46 57.912,47.879 57.912,49.022
  Bottom Layer w0.254: v1(56.896,49.022) C15.2@58.374,49.022
NetC24_1: C24.1 DD5.106 | length 5.5
  Top Layer w0.254: DD5.106@85.356,23.101 85.356,21.07 85.979,20.447 87.122,20.447 87.63,20.955 C24.1@87.63,21.717
NetC25_1: C25.1 DD5.71 | length 3.3
  Top Layer w0.254: v1(65.151,26.162) 65.912,25.401 DD5.71@67.056,25.401
  Bottom Layer w0.254: v1(65.151,26.162) 65.278,26.289 C25.1@66.218,26.289
NetC48_1: C48.1 C50.1 DA9.1 DA10.6 | length 16.8
  Top Layer w0.35: C48.1@170.053,45.717 170.053,45.72 C50.1@174.371,45.72 ; DA9.1@174.371,39.903 v1(174.371,42.037) 178.816,42.037 179.324,41.529 DA10.6@179.324,40.042
  Bottom Layer w0.35: v1(174.371,42.037) C50.1@174.371,45.72
NetC48_2: C48.2 C50.2 R42.1 | length 9.8
  Top Layer w0.35: C48.2@170.053,48.517 170.053,48.26 C50.2@174.371,48.26 176.019,48.26 R42.1@178.562,45.717
NetC52_1: C52.1 R42.2 X2.1@178.629,52.297 | length 7.6
  Top Layer w0.35: X2.1@178.613,52.297 178.562,52.246 R42.2@178.562,48.517 178.562,48.13 C52.1@180.975,45.717
NetC56_1: C56.1 C58.1 DA11.1 DA12.6 | length 16.8
  Top Layer w0.35: C56.1@152.019,45.717 152.019,45.72 C58.1@156.337,45.72 ; DA11.1@156.337,39.903 v1(156.337,42.037) 160.782,42.037 161.29,41.529 DA12.6@161.29,40.042
  Bottom Layer w0.35: v1(156.337,42.037) C58.1@156.337,45.72
NetC56_2: C56.2 C58.2 R44.1 | length 9.8
  Top Layer w0.35: C56.2@152.019,48.517 152.019,48.26 C58.2@156.337,48.26 157.985,48.26 R44.1@160.528,45.717
NetC60_1: C60.1 R44.2 X3.1@160.579,52.297 | length 7.6
  Top Layer w0.35: X3.1@160.579,52.297 160.528,52.246 R44.2@160.528,48.517 160.528,48.13 C60.1@162.941,45.717
NetC73_1: C73.1 DA14.3 | length 10.3
  Top Layer w0.5: DA14.3@10.668,43.134 v2(10.668,47.879) ; v2(13.97,47.879) C73.1@16.256,47.879
  Bottom Layer w0.5: v2(10.668,47.879) v2(13.97,47.879)
NetC73_2: C73.2 D7.2 DA14.1 L1.1 | length 5.9
  Top Layer w0.5: C73.2@16.256,46.279 16.256,43.144 D7.2@19.05,43.144
NetC83_2: C83.2 DA16.16 | length 3.4
  Top Layer w0.35: C83.2@125.166,43.998 125.476,44.308 DA16.16@128.443,44.308
NetC84_1: C84.1 DA16.14 R52.1 | length 5.8
  Top Layer w0.35: R52.1@123.439,47.554 125.385,45.608 DA16.14@128.458,45.608
NetC85_2: C85.2 R55.2 | length 6.1
  Top Layer w0.35: C85.2@133.477,51.511 137.338,51.511 138.049,50.8 R55.2@138.049,49.53
NetC86_2: C86.2 R54.1 | length 2
  Top Layer w0.35: R54.1@126.746,50.876 127.381,51.511 C86.2@128.524,51.511
NetD1_2: D1.2 R13.1 | length 54.4
  Top Layer w0.35: D1.2@24.257,4.46 30.592,10.795 61.087,10.795 64.059,13.767 R13.1@74.803,13.767
NetD1_3: D1.3 R14.1 | length 54.8
  Top Layer w0.35: D1.3@26.007,3.81 32.357,10.16 61.341,10.16 63.246,12.065 75.006,12.065 R14.1@76.708,13.767
NetD10_2: D10.2 DA16.20 L2.2 | length 2.5
  Top Layer w0.5: D10.2@125.818,37.338 128.343,37.338 L2.2@128.348,37.343